# EAGLE board pwm_nmos_simple (EAGLE 6.4)
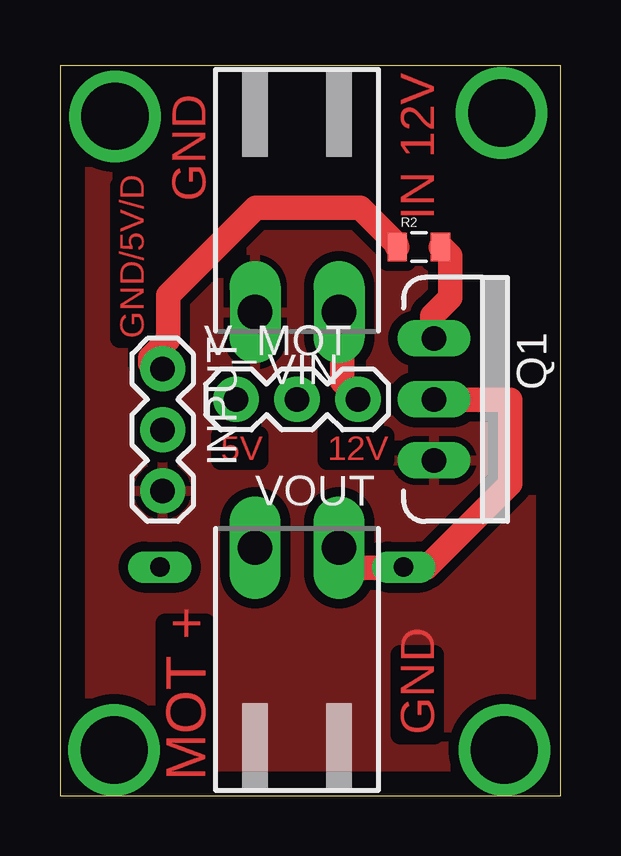
[diagram p0: board, top side]
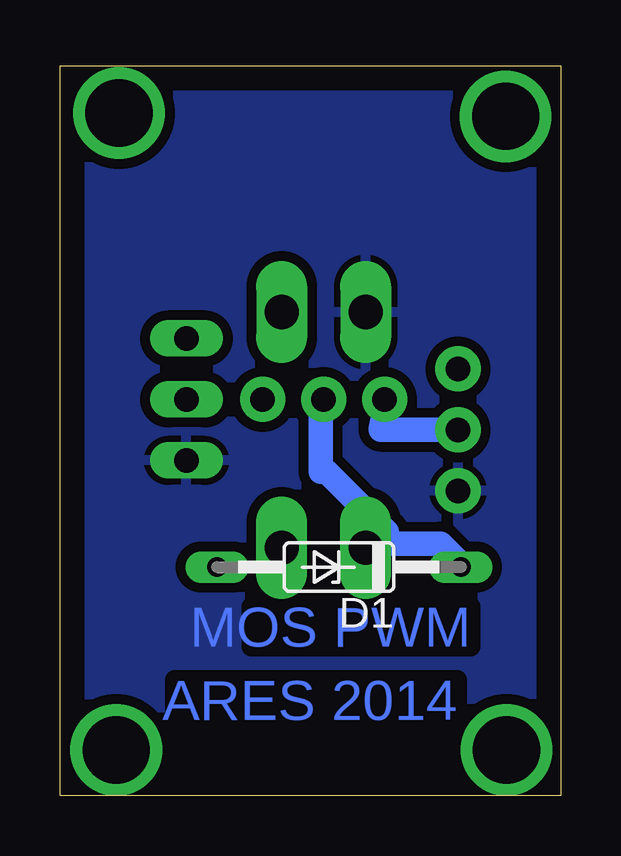
[diagram p1: board, bottom side, seen from below]

Size 20.86 x 30.42 mm. Coordinates in mm from the lower left corner, seen from the top.
Outline: 0,0 20.86,0 20.86,30.42 0,30.42 0,0
Copper layers (1*16): Top 0.1mm / dielectric 1.5mm / Bottom 0.1mm
Design rules "ensea *": minimum track width 0.4mm, minimum drill 0.6mm, track to track 0.3mm, track to pad 0.3mm, pad to pad 0.3mm, via to via 0.3mm, smd to smd 8mil, copper to edge 40mil, drill to drill 8mil, minimum pad ring 10mil, minimum via ring 8mil, stop-mask expansion 4mil, vias tented up to drill 0mil, thermal gap 10mil
Net classes: 0 default: width 1.016 mm, drill 0.6 mm, clearance 0.3 mm

## Footprints (pad centres in the part's own frame; a part is rotated, then mirrored left to right if it is on the bottom)
DO35Z10 = drill 0.813 long: A 5.08,0; C -5.08,0
1X03 = drill 1.016 pad 1.88: 1 0,0; 2 2.54,0; 3 5.08,0
TO220V = drill 1.016 long: 1 -2.54,0; 2 0,0; 3 2.54,0
0805 = smd 0.8 x 1.2: 1 -0.9,0; 2 0.9,0
90-2 = drill 1.422 long: 1 -1.75,5.25; 2 1.75,5.25

## Placement (x,y rotation side)
D1  1N821  [DO35Z10]  9.24,9.53 180 bottom
INPUT  [1X03]  4.28,17.78 270 top
Q1  MOSFET-NCHANNELFQP30N06L  [TO220V]  15.59,16.51 270 top
R2  10ohm  [0805]  14.95,22.86 0 top
V_MOT  [1X03]  7.34,16.51 0 top
VIN  [90-2]  9.88,25.4 180 top
VOUT  [90-2]  9.88,5.08 0 top

## Library data of the parts
D1 = diode
INPUT = SparkFun-Electromechanical
Q1 = SparkFun-DiscreteSemi; PROD_ID: TRANS-10060
R2 = SparkFun-Resistors
V_MOT = SparkFun-Connectors
VIN VOUT = con-weidmueller-sl35; OC_FARNELL: unknown; OC_NEWARK: unknown

## Nets
12V: V_MOT.3 VIN.1
GND: INPUT.3 Q1.3 VIN.2
IN_MOS: INPUT.1 R2.1
N$3: Q1.1 R2.2
V+_MOT: D1.C V_MOT.2 VOUT.1
VCC: INPUT.2 V_MOT.1
VOUT: D1.A Q1.2 VOUT.2

## Tracks (layer width: path | path; a pad name or v marks a point on that pad's centre or on a via)
12V
  Top 1.016: V_MOT.3 12.25,16.75 11.75,17.25 11.75,20 VIN.1
GND
  pour Top (isolate 0.406): -7.27,54.61 -7.27,-1.27 35.91,-1.27 35.91,55.88 -7.27,55.88
  pour Bottom (isolate 0.406): -9.18,52.7 -9.18,-0.64 34.64,0 34.64,53.34 -6,53.34
IN_MOS
  Top 1.016: R2.1 14,23 12.5,24.5 8.15,24.5 4.5,20.85 4.5,19 3.75,18.25 3.75,18 INPUT.1
N$1  (via drill 2.8)
  other vias: 18.4,28.44
N$3
  Top 1.016: R2.2 16,22.75 16.25,22.5 16.25,20.75 15.5,20 15.5,19.25 Q1.1
N$4  (via drill 2.8)
  other vias: 18.52,1.91
N$7  (via drill 2.8)
  other vias: 2.29,28.3
N$9  (via drill 2.8)
  other vias: 2.26,1.91
V+_MOT
  Bottom 1.016: D1.C 4.25,9.75 5,10.5 8,10.5 VOUT.1 7.25,11 9.75,13.5 10,13.5 10,16.5 V_MOT.2
VCC
  Bottom 1.016: INPUT.2 4.25,15.25 7.5,15.25 7.25,16.5 V_MOT.1
VOUT
  Top 1.016: VOUT.2 11.75,10.25 11.75,9.5 14.25,9.5 D1.A 14.75,9.5 15.25,9.5 18.75,13 18.75,16.5 15.75,16.5 Q1.2

## Text on the board
Top: GND | IN 12V | GND/5V/D | 5V | 12V | GND | MOT +
Bottom: MOS PWM | ARES 2014